# Altium PCB RFModAdapter_v1.PcbDoc
Units mm, origin at the board's own origin, x right, y up, seen from the top; angles counter-clockwise.
Board outline 32 x 45 mm, 2 copper layers (Top Layer, Bottom Layer), stack 1.671 mm thick; 22 components, 31 nets, 151 pads, 0 vias.
Unrouted connection lines stored in the file: 84.
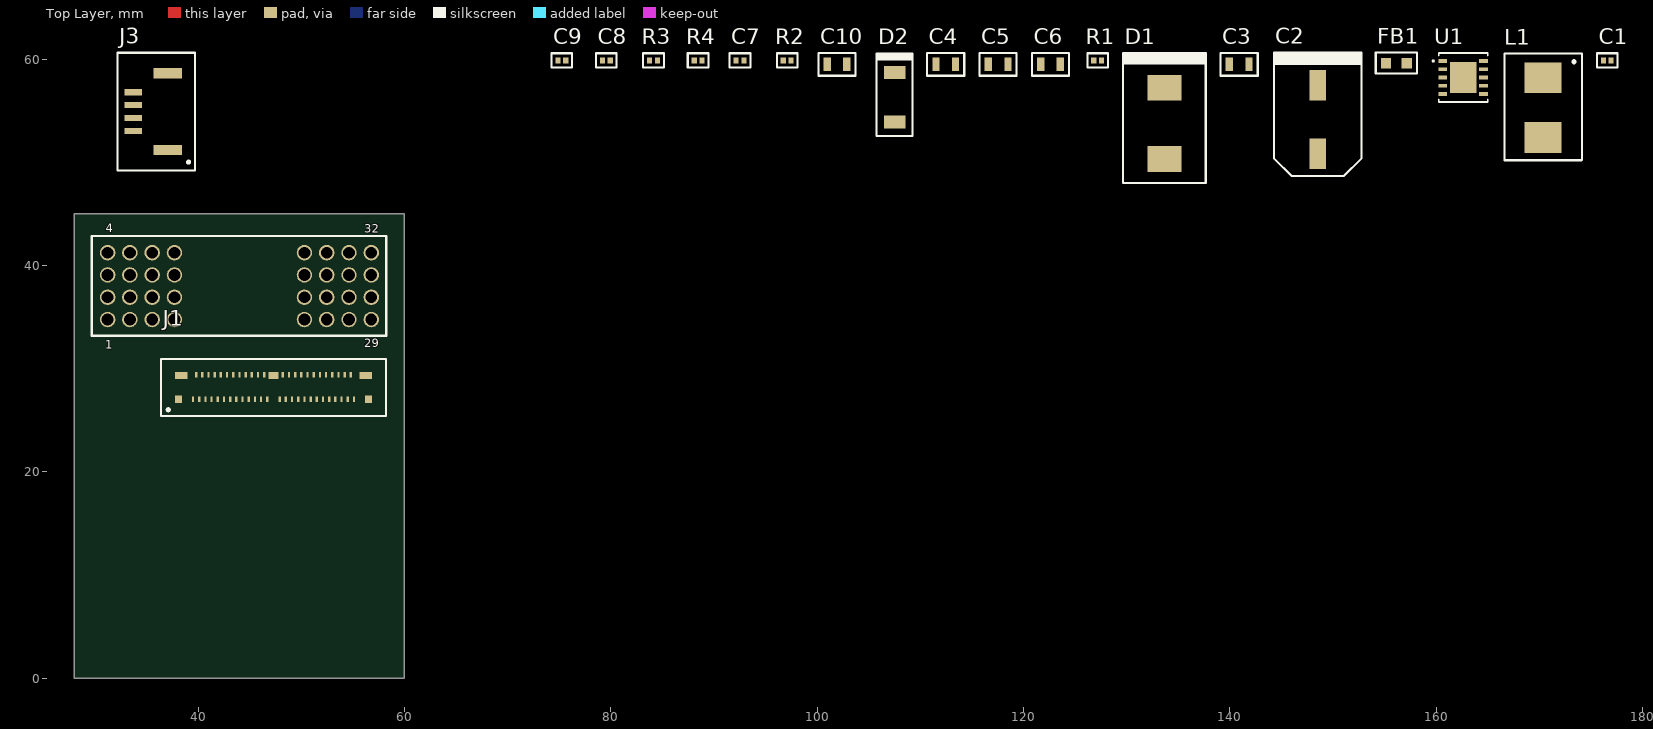
[diagram p0: Top Layer view]
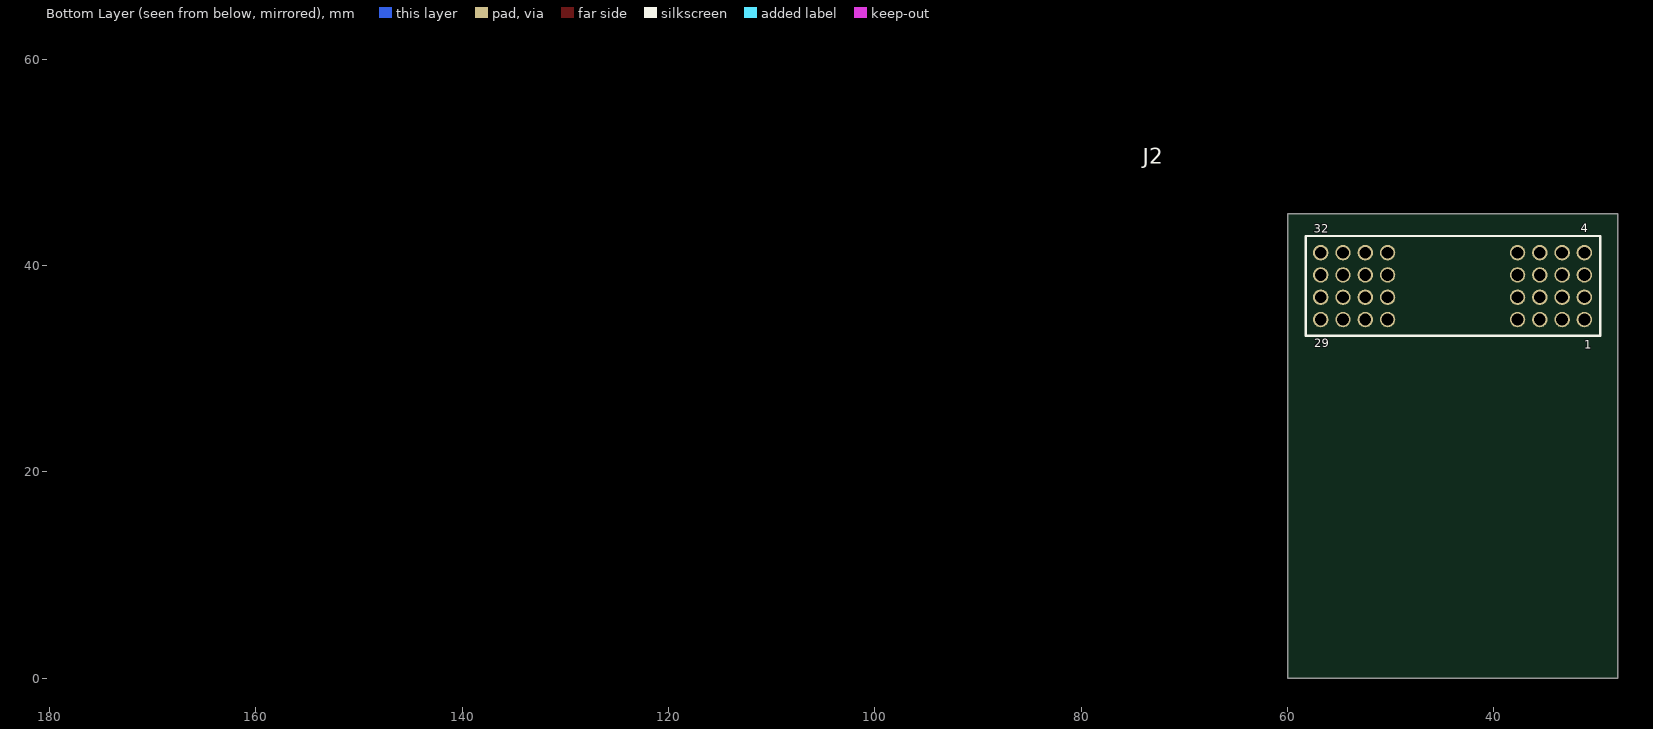
[diagram p1: Bottom Layer view, seen from below]

## Layer stack, top to bottom
Top Solder: solder mask 0.0102, Solder Resist, Dk 3.5
Top Layer: signal copper 0.0356
Dielectric 1: dielectric 1.6, FR-4, Dk 4.8
Bottom Layer: signal copper 0.0356
Bottom Solder: solder mask 0.0102, Solder Resist, Dk 3.5

## Board outline
28,0 28,45 60,45 60,0

## Design rules (kind name [scope] priority, off if disabled: settings)
AcuteAngle [All] p1: minimum=6.00000000000000E+0001 checktracksonly=FALSE
BoardOutlineClearance [All] p1: gap=0.2 ignorepadtopadclearanceinfootprint=FALSE
Clearance [All] p1: gap=0.152 ignorepadtopadclearanceinfootprint=FALSE
DiffPairsRouting [All] p1: maxlimit=0.254 minlimit=0.254 mostfreqgap=0.254 toplayer_minwidth=0.381 toplayer_maxwidth=0.381 toplayer_prefwidth=0.381 bottomlayer_minwidth=0.381 bottomlayer_maxwidth=0.381 bottomlayer_prefwidth=0.381 maxuncoupledlength=12.7
HoleSize [All] p1: absolutevalues=TRUE maxlimit=1 minlimit=0.15 maxpercent=80.000 minpercent=20.000
HoleToHoleClearance [All] p1: gap=0.3 allowstackedmicrovias=TRUE
MinimumAnnularRing [All] p1: minimumring=0.102
MinimumSolderMaskSliver [All] p1: minsoldermaskwidth=0.16
PolygonConnect [All] p1: connectstyle=Relief reliefconductorwidth=0.254 reliefentries=4 polygonreliefangle="90 Angle" airgapwidth=0.254
RoutingVias [All] p1: holewidth=0.3 width=0.15 viastyle="Through Hole" minholewidth=0.15 minwidth=0.102 maxholewidth=1 maxwidth=0.5
ShortCircuit ShortCircuit_any [Not InAnyNet vs Not InAnyNet] p1: allowed=TRUE
ShortCircuit [All] p2: allowed=FALSE
SilkToSilkClearance [All] p1: silktosilkclearance=0.16
SilkToSolderMaskClearance [IsPad] p1: minsilkscreentomaskgap=0.16 clearancetoexposedcopper=TRUE
SolderMaskExpansion [All] p1: expansion=0.102
Width [All] p1: maxlimit=1.5 minlimit=0.152 preferedwidth=0.254
23 further rules are at their usual default settings.

## Classes and differential pairs
differential pair USB0_D: +USB0_D_P -USB0_D_N
differential pair ETH0_TX: +ETH0_TX_P -ETH0_TX_N
differential pair ETH0_RX: +ETH0_RX_P -ETH0_RX_N

## Components (designator, comment, footprint, x,y, rotation, side; value= is the part's Value field where it differs from the comment)
C1 "100n" CAP_0402 176.596,59.872 r0 top
C2 "47u" "25SVPF47M C6" 148.529,54.157 r90 top
C3 "1u" CAP_0805 140.909,59.491 r0 top
C4 "2.2u" CAP_0805 112.461,59.491 r0 top
C5 "2.2u" CAP_0805 117.541,59.491 r0 top
C6 "2.2u" CAP_0805 122.621,59.491 r0 top
C7 "2.7n" CAP_0402 92.522,59.872 r0 top
C8 "82p" CAP_0402 79.568,59.872 r0 top
C9 "15n" CAP_0402 75.25,59.872 r0 top
C10 "2.2u" CAP_0805 101.92,59.491 r0 top
D1 "B560C-13-F" B560C-13-F 133.67,53.776 r90 top
D2 "26V" DO-214AC_diode 107.508,56.316 r90 top
FB1 "7m" ferrite_0603 156.149,59.618 r0 top
J1 "DF56-50S-0.3V(51)" Header_Hirose_DF56 47.3,28.215 r0 top
J2 "TE-32M-ASSY" TE-32M-ASSY 44,38 r180 bottom
J3 "JST-BM04B-GHS" JST-BM04B_HEADER 35.372,54.919 r90 top
L1 "10u" ETQ-P3M100HFN 170.373,55.3 r90 top
R1 "191k" RES_0402 127.193,59.872 r0 top
R2 "10k" RES_0402 97.094,59.872 r0 top
R3 "124k" RES_0402 84.14,59.872 r0 top
R4 "11k" RES_0402 88.458,59.872 r0 top
U1 "TPS54561DPRR" WSON-10 162.626,58.221 r0 top

## Footprints (in the part's own frame and the unit in brackets; to place one, negate y for a bottom-side part, rotate by r counter-clockwise, add the part's x,y. Pads: shape width x height; smd on the part's side, far side on the other; paste and mask are expansions set on the pad)
"25SVPF47M C6" [mm]
  rect 2.95x1.6 smd: 1(-3.325,0) 2(3.325,0)
  silkscreen extent -5.5,-4.3 6.5,4.25, body extent -3.65,-3.3 3.65,3.3, height 7.11
B560C-13-F [mm]
  rect 2.5x3.3 smd: 1(3.45,0) 2(-3.45,0)
  silkscreen extent -5.8,-4 6.8,4, body extent -4.07,-3.11 4.06,3.11, height 2.45
CAP_0402 [mm]
  rect 0.5x0.6 smd: 1(-0.375,0) 2(0.375,0)
  silkscreen extent -1,-0.7 1,0.7, body extent -0.5,-0.25 0.5,0.25, height 0.5
CAP_0805 [mm]
  rect 0.7x1.3 smd: 1(-0.95,0) 2(0.95,0)
  silkscreen extent -1.8,-1.1 1.8,1.1, body extent -1.05,-0.73 1.15,0.72, height 1.4
DO-214AC_diode [mm]
  rect 1.27x2.1 smd: 1(2.4,0) 2(-2.4,0)
  silkscreen extent -3.75,-1.75 4.25,1.75, body extent -2.5,-1.35 2.5,1.35, height 2.32
ETQ-P3M100HFN [mm]
  rect 3x3.6 smd: 1(-2.9,0) 2(2.9,0)
  silkscreen extent -5.1,-3.75 5.25,3.75, body extent -3.25,-3 3.25,4, height 3
ferrite_0603 [mm]
  rect 1x1 smd: 1(-1,0) 2(1,0)
  silkscreen extent -2,-1.02 2,1.02, body extent -0.8,-0.4 0.8,0.4, height 0.8
Header_Hirose_DF56 [mm]
  rect 0.22x0.52 smd: 1(-7.8,-1.185) 2(-7.5,1.185) 3(-7.2,-1.185) 4(-6.9,1.185) 5(-6.6,-1.185) 6(-6.3,1.185) 7(-6,-1.185) 8(-5.7,1.185) 9(-5.4,-1.185) 10(-5.1,1.185) 11(-4.8,-1.185) 12(-4.5,1.185) 13(-4.2,-1.185) 14(-3.9,1.185) 15(-3.6,-1.185) 16(-3.3,1.185) 17(-3,-1.185) 18(-2.7,1.185) 19(-2.4,-1.185) 20(-2.1,1.185) 21(-1.8,-1.185) 22(-1.5,1.185) 23(-1.2,-1.185) 24(-0.9,1.185) 25(-0.6,-1.185) 26(0.9,1.185) 27(0.6,-1.185) 28(1.2,-1.185) 29(1.5,1.185) 30(1.8,-1.185) 31(2.1,1.185) 32(2.4,-1.185) 33(2.7,1.185) 34(3,-1.185) 35(3.3,1.185) 36(3.6,-1.185) 37(3.9,1.185) 38(4.2,-1.185) 39(4.5,1.185) 40(4.8,-1.185) 41(5.1,1.185) 42(5.4,-1.185) 43(5.7,1.185) 44(6,-1.185) 45(6.3,1.185) 46(6.6,-1.185) 47(6.9,1.185) 48(7.2,-1.185) 49(7.5,1.185) 50(7.8,-1.185)
  rect 0.7x0.7 smd: GND(-9.2,-1.175) GND(9.2,-1.175)
  rect 1.2x0.7 smd: GND(-8.95,1.125) GND(8.95,1.125)
  rect 1x0.7 smd: GND(0,1.125)
  silkscreen extent -10.9,-2.8 10.9,2.7, body extent -9.95,-1.35 9.95,5.2, height 2.9
JST-BM04B_HEADER [mm]
  rect 0.6x1.7 smd: 1(-1.875,1.675) 2(-0.625,1.675) 3(0.625,1.675) 4(1.875,1.675)
  rect 1x2.8 smd: GND(-3.725,-1.675) GND(3.725,-1.675)
  silkscreen extent -5.7,-4.3 5.7,3.2, body extent -4.9,-3.7 4.13,1.98, height 4.05
RES_0402 [mm]
  rect 0.5x0.6 smd: 1(-0.375,0) 2(0.375,0)
  silkscreen extent -1,-0.7 1,0.7, body extent -0.5,-0.25 0.5,0.25, height 0.25
TE-32M-ASSY [mm]
  round 1.5 / inner round 1.2 / far side round 1.5 hole 1.143: 1(12.78,-3.24) 2(12.78,-1.08) 3(12.78,1.08) 4(12.78,3.24) 5(10.62,-3.24) 6(10.62,-1.08) 7(10.62,1.08) 8(10.62,3.24) 9(8.46,-3.24) 10(8.46,-1.08) 11(8.46,1.08) 12(8.46,3.24) 13(6.3,-3.24) 14(6.3,-1.08) 15(6.3,1.08) 16(6.3,3.24) 17(-6.3,-3.24) 18(-6.3,-1.08) 19(-6.3,1.08) 20(-6.3,3.24) 21(-8.46,-3.24) 22(-8.46,-1.08) 23(-8.46,1.08) 24(-8.46,3.24) 25(-10.62,-3.24) 26(-10.62,-1.08) 27(-10.62,1.08) 28(-10.62,3.24) 29(-12.78,-3.24) 30(-12.78,-1.08) 31(-12.78,1.08) 32(-12.78,3.24)
  silkscreen extent -14.23,-4.81 14.32,4.87, body extent -30.28,-11.25 30.42,11.1, height 14.29
WSON-10 [mil]
  rect 33x14 smd paste-7 mask+3: 1(-77.76,62.99) 1(-77.76,62.99) 2(-77.76,31.5) 2(-77.76,31.5) 3(-77.76,0) 3(-77.76,0) 4(-77.76,-31.5) 4(-77.76,-31.5) 5(-77.76,-62.99) 5(-77.76,-62.99) 6(77.76,-62.99) 6(77.76,-62.99) 7(77.76,-31.5) 7(77.76,-31.5) 8(77.76,0) 8(77.76,0) 9(77.76,31.5) 9(77.76,31.5) 10(77.76,62.99) 10(77.76,62.99)
  rect 102x118 smd paste-58.5 mask+0: 11(0,0) 11(0,0)
  silkscreen extent -117,-94 94,94, body extent -80,-79 80,79, height 30

## Part data
C1: library part "0402, 100nF, 50V, X7R, ESR 0m, MLCC", "0402, 100nF, 50V, X7R, ESR 0m, MLCC", Manufacturer=Any, Part description="0402, 100nF, 50V, X7R, ESR 0m, MLCC"
C2: library part "47uF 25SVPF47M", "47µF 25V Aluminum Polymer Capacitor Radial, Can - SMD 30mOhm 5000 Hrs @ 105°C", Manufacturer="Panasonic Electronic Components", Part number=25SVPF47M
C3: library part "0805, 1uF, 50V, X7R, ESR 0m, MLCC", "0805, 1uF, 50V, X7R, ESR 0m, MLCC", Manufacturer="0805, 1uF, 50V, X7R, ESR 0m, MLCC", Part description=Any
C4 C5 C6 C10: library part "0805, 2.2uF, 50V, X5R, ESR 0m, MLCC", "0805, 2.2uF, 50V, X5R, ESR 0m, MLCC", Manufacturer=Any, Part description="0805, 2.2uF, 50V, X5R, ESR 0m, MLCC"
C7: library part "0402, 2.7nF, 50V, X7R, ESR 0m, MLCC", "0402, 2.7nF, 50V, X7R, ESR 0m, MLCC", Manufacturer=Any, Part description="0402, 2.7nF, 50V, X7R, ESR 0m, MLCC"
C8: library part "0402, 82pF, 50V, C0G/NP0, ESR 0m, MLCC", "0402, 82pF, 50V, C0G/NP0, ESR 0m, MLCC", Manufacturer=Any, Part description="0402, 82pF, 50V, C0G/NP0, ESR 0m, MLCC"
C9: library part "0402, 15nF, 50V, X7R, ESR 0m, MLCC", "0402, 15nF, 50V, X7R, ESR 0m, MLCC", Manufacturer=Any, Part description="0402, 15nF, 50V, X7R, ESR 0m, MLCC"
D1: "Diode Schottky 60V 5A Surface Mount SMC", Manufacturer="Diodes Inc.", Part number=B560C-13-F
D2: library part SMAJ26A-Q, "26V Standoff, 42.1V Clamp 9.5A Ipp Tvs Diode Surface Mount DO-214AC (SMA)", Manufacturer=Bourns, Supplier Part Number 1=652-SMAJ26A-Q, Link=https://eu.mouser.com/ProductDetail/Bourns/SMAJ26A-Q?qs=sGAEpiMZZMvxHShE6Whpu9pBowPIygZN5%252BokUABxykU%3D, Manufacturer Part Number=SMAJ26A-Q, Part number=SMAJ26A-Q, Pricing 1="1=0.39, 10=0.282, 50=0.282, 100=0.191, 500=0.158, 1000=0.11, 5000=0.099, 10000=0.094, 25000=0.087, 50000=0.08 (USD)", Stock 1=3773, Supplier 1=Mouser
FB1: library part FBMJ1608HM230NT, "23 Ohms @ 100MHz 1 Power Line Ferrite Bead 0603 (1608 Metric) 4A 7mOhm", Case/Package=0603, Case Code (Metric)=1608, DC Resistance (DCR)=7mR, Frequency=100MHz, Manufacturer="Taiyo Yuden", Max Current Rating=4A, Max Operating Temperature=125°C, Min Operating Temperature=-40°C, Package Quantity=1, Supplier Part Number 1=963-FBMJ1608HM230NT, Tolerance=30%, Case Code (Imperial)=0603, ComponentLink1Description=http://documents.rs-components.com/techlib://itc_doclist_GB.htm?stockno=7555649&src-supplier=RSComponents, ComponentLink1URL=http://documents.rs-components.com/techlib://itc_doclist_GB.htm?stockno=7555649&src-supplier=RSComponents, ComponentLink2Description=http://ds.yuden.co.jp/TYCOMPAS/ut/detail.do?productNo=FBMJ1608HM230NT&fileName=FBMJ1608HM230NT_SS&mode=specSheetDownload&src-supplier=Digi-Key, ComponentLink2URL=http://ds.yuden.co.jp/TYCOMPAS/ut/detail.do?productNo=FBMJ1608HM230NT&fileName=FBMJ1608HM230NT_SS&mode=specSheetDownload&src-supplier=Digi-Key, ComponentLink3Description=http://www.yuden.co.jp/productdata/catalog/en/chipbeads01_e.pdf?src-supplier=Digi-Key, ComponentLink3URL=http://www.yuden.co.jp/productdata/catalog/en/chipbeads01_e.pdf?src-supplier=Digi-Key, Composition="Ferrite Bead", Core Material=Ferrite, Depth=0.95mm, Halogen Free="Halogen Free", Height=0.8mm, Impedance=23R, Lead Free="Lead Free", Length=1.6mm, Link=https://eu.mouser.com/ProductDetail/Taiyo-Yuden/FBMJ1608HM230NT?qs=I6KAKw0tg2z0Uk65Nuq%2FcA==, Manufacturer Part Number=FBMJ1608HM230NT, Material=Ferrite, Max DC Current=4A, Mount="Surface Mount", Number of Lines=1, Number of Pins=2, Packaging="Tape and Reel", Part number=FBMJ1608HM230NT, Pricing 1="1=0.1, 10=0.05, 50=0.05, 100=0.034, 500=0.029, 1000=0.024, 4000=0.022, 8000=0.019, 10000=0.019, 24000=0.018 (USD)", REACH SVHC=Unknown, Shielding=Unshielded, Stock 1=10439, Supplier 1=Mouser, Termination=SMD/SMT, Test Frequency=100MHz, Width=0.031inch
J1: "CONN RCPT 50POS 0.012 GOLD SMD", Color=Black, Manufacturer=Hirose, Package Quantity=5000, Supplier Part Number 1=798-DF56-50S-0.3V51, Category=Connectors, ComponentLink1Description=https://www.hirose.com/product/en/download_file/key_name/DF56-50S-0.3V%2851%29/category/Specification%20Sheet/doc_file_id/45372/?file_category_id=9&item_id=06625606751&is_series=&src-supplier=Digi-Key, ComponentLink1URL=https://www.hirose.com/product/en/download_file/key_name/DF56-50S-0.3V%2851%29/category/Specification%20Sheet/doc_file_id/45372/?file_category_id=9&item_id=06625606751&is_series=&src-supplier=Digi-Key, ComponentLink2Description=http://www.mouser.com/ds/2/185/DF56_catalog-939255.pdf?src-supplier=Mouser, ComponentLink2URL=http://www.mouser.com/ds/2/185/DF56_catalog-939255.pdf?src-supplier=Mouser, Connector Type=Receptacle,Non-Gendered, Contact Plating=Gold, Fastening Type=Detent, Manufacturer Part Number=DF56-50S-0.3V(51), Mount="Surface Mount", Number of Positions=50, Number of Rows=1, Packaging="Tape and Reel", Pitch=0.012inch, Pricing 1="1=1.65, 10=1.47, 25=1.35, 50=1.35, 100=1.29, 250=1.16, 500=1.07, 1000=0.915, 10000=0.915 (USD)", Stock 1=0, Supplier 1=Mouser, Termination=Solder
J2: library part Pogo-connector-32pin-API, "API/SupplyNet pogo-pin connector, 32pins, 4 rows", Manufacturer=SupplyNet, Part number=TE-32M-ASSY
J3: library part BM04B-GHS-TBT(LF)(SN)(N), "CONN HEADER SMD 4POS 1.25MM, JST-GH series", Color=Natural, Manufacturer=JST, Supplier Part Number 1=455-1580-6-ND, Category=Connectors, Connector Type="Outer Shroud Contact", Contact Plating=Tin, Fastening Type=Ramp, Lead Free="Lead Free", Manufacturer Part Number=BM04B-GHS-TBT(LF)(SN)(N), Mount="Surface Mount", Number of Pins=4, Number of Positions=4, Number of Rows=1, Packaging="Tape and Reel", Pitch=0.049inch, Pricing 1="1=0.44, 10=0.413, 100=0.3163, 500=0.275, 1000=0.2269 (USD)", Stock 1=145959, Supplier 1=Digi-Key, Termination=Solder
L1: library part "10u ETQ-P3M100HFN", "10µH Shielded  Inductor 3.7A 74.8mOhm Max 2-SMD, J-Lead", Manufacturer="Panasonic Electronic Components", Part number=ETQ-P3M100HFN
R1: library part "Resistor 0402 191k", "0402, 191k, 1%, 0.1W, Res", Manufacturer=Any, Part description="0402, 191k, 1%, 0.1W, Res"
R2: library part "Resistor 0402 10k", "0402, 10k, 1%, 0.1W, Res", Manufacturer=Any, Part description="0402, 10k, 1%, 0.1W, Res"
R3: library part "Resistor 0402 124k", "0402, 124k, 1%, 0.1W, Res", Manufacturer=Any, Part description="0402, 124k, 1%, 0.1W, Res"
R4: library part "Resistor 0402 11k", "0402, 11k, 1%, 0.1W, Res", Manufacturer=Any, Part description="0402, 11k, 1%, 0.1W, Res"
U1: "Buck, Split Rail Switching Regulator IC Positive Adjustable 0.8V 1 Output 5A 10-WDFN Exposed Pad", Manufacturer="Texas Instruments", Part number=TPS54331DDA

## Nets (pads, with @x,y where several pads share a name; then routed paths per layer and width w, separated by ;. In a path a pad name is that pad's centre, name@x,y a point inside that pad or via, vN(x,y) a via of type N, cw(c..) or ccw(c..) an arc to the next point about the centre after c; other vN are vias at no path point)
+16V: C2.1 C3.1 J3.1 J3.2 L1.2 R1.2
"+16V BOOT": C1.2 U1.1
"+16V COMP": C8.1 R4.2 U1.7
"+16V FB": R1.1 R2.2 U1.6
"+16V RT": R3.2 U1.5
"+16V SS": C7.1 U1.4
"+16V SW": C1.1 D1.1 L1.1 U1.9
+VBAT: C10.1 FB1.1 J2.1 J2.2
Audio_GND: J1.2 J2.6
ETH0_RX_N: J1.44 J2.30
ETH0_RX_P: J1.46 J2.29
ETH0_TX_N: J1.48 J2.26
ETH0_TX_P: J1.50 J2.25
GND: C2.2 C3.2 C4.2 C5.2 C6.2 C7.2 C8.2 C9.2 C10.2 D1.2 D2.2 J1.6 J1.7 J1.10 J1.49 J1.GND J2.3 J2.4 J2.11 J2.12 J2.27 J3.3 J3.4 J3.GND R2.1 R3.1 U1.8 U1.11
GPIO1: J1.9 J2.14
LED_A1: J1.37 J2.31
LED_A2: J1.40 J2.32
Mic_in+: J1.8 J2.13
Mic_in-: J1.4 J2.9
NetC9_1: C9.1 R4.1
PTT: J1.5 J2.10
RS232_RXD: J1.14 J2.16
RS232_TXD: J1.12 J2.15
SHUTDOWN: J1.47 J2.21
Speaker_out+: J1.1 J2.5
Speaker_out-: J1.3 J2.7
USB0_D_N: J1.21 J2.17
USB0_D_P: J1.23 J2.18
USB0_GND: J1.19 J1.20 J1.22 J2.20 J2.24 J2.28
USB0_VBUS: J1.24 J1.25 J1.26 J2.19 J2.22 J2.23
Vin: C4.1 C5.1 C6.1 D2.1 FB1.2 U1.2
pads on no net: J1.11 J1.13 J1.15 J1.16 J1.17 J1.18 J1.27 J1.28 J1.29 J1.30 J1.31 J1.32 J1.33 J1.34 J1.35 J1.36 J1.38 J1.39 J1.41 J1.42 J1.43 J1.45 J2.8 U1.3 U1.10

## Text inside footprints (layer, text, board x,y; h text height)
J2: Top Overlay "1" at 30.975,31.925 h0.8; Top Overlay "4" at 31.025,43.225 h0.8; Top Overlay "29" at 56.1,32.075 h0.8; Top Overlay "32" at 56.1,43.175 h0.8; Bottom Overlay "32" at 57.45,43.15 h0.8; Bottom Overlay "29" at 57.4,32.075 h0.8; Bottom Overlay "4" at 31.55,43.225 h0.8; Bottom Overlay "1" at 31.25,31.925 h0.8